# EAGLE board KRP_SMproject#2 (EAGLE 9.4.2)

Size 160 x 100 mm. Coordinates in mm from the lower left corner, seen from the top.
Outline: 0,0 160,0 160,100 0,100 0,0
Copper layers (1*16): Top 0.035mm / dielectric 1.5mm / Bottom 0.035mm
Design rules "default": minimum track width 6mil, minimum drill 0.35mm, track to track 6mil, track to pad 6mil, pad to pad 6mil, via to via 6mil, smd to smd 6mil, copper to edge 40mil, drill to drill 6mil, minimum pad ring 10mil, minimum via ring 8mil, stop-mask expansion 4mil, vias tented up to drill 0mil, thermal gap 10mil

## Footprints (pad centres in the part's own frame; a part is rotated, then mirrored left to right if it is on the bottom)
CAPC1608X90N = smd 0.75 x 0.94: 1 -0.7,0; 2 0.7,0
SODFL1608X70N = smd 0.55 x 0.42: 1 -0.8,0; 2 0.8,0
QFP50P1200X1200X160-64N = smd 1.45 x 0.3: 1 -5.75,3.75; 2 -5.75,3.25; 3 -5.75,2.75; 4 -5.75,2.25; 5 -5.75,1.75; 6 -5.75,1.25; 7 -5.75,0.75; 8 -5.75,0.25; 9 -5.75,-0.25; 10 -5.75,-0.75; 11 -5.75,-1.25; 12 -5.75,-1.75; 13 -5.75,-2.25; 14 -5.75,-2.75; 15 -5.75,-3.25; 16 -5.75,-3.75; 33 5.75,-3.75; 34 5.75,-3.25; 35 5.75,-2.75; 36 5.75,-2.25; 37 5.75,-1.75; 38 5.75,-1.25; 39 5.75,-0.75; 40 5.75,-0.25; 41 5.75,0.25; 42 5.75,0.75; 43 5.75,1.25; 44 5.75,1.75; 45 5.75,2.25; 46 5.75,2.75; 47 5.75,3.25; 48 5.75,3.75 | smd 0.3 x 1.45: 17 -3.75,-5.75; 18 -3.25,-5.75; 19 -2.75,-5.75; 20 -2.25,-5.75; 21 -1.75,-5.75; 22 -1.25,-5.75; 23 -0.75,-5.75; 24 -0.25,-5.75; 25 0.25,-5.75; 26 0.75,-5.75; 27 1.25,-5.75; 28 1.75,-5.75; 29 2.25,-5.75; 30 2.75,-5.75; 31 3.25,-5.75; 32 3.75,-5.75; 49 3.75,5.75; 50 3.25,5.75; 51 2.75,5.75; 52 2.25,5.75; 53 1.75,5.75; 54 1.25,5.75; 55 0.75,5.75; 56 0.25,5.75; 57 -0.25,5.75; 58 -0.75,5.75; 59 -1.25,5.75; 60 -1.75,5.75; 61 -2.25,5.75; 62 -2.75,5.75; 63 -3.25,5.75; 64 -3.75,5.75
SOIC127P600X175-8N = smd 1.525 x 0.7: 1 -2.712,1.905; 2 -2.712,0.635; 3 -2.712,-0.635; 4 -2.712,-1.905; 5 2.712,-1.905; 6 2.712,-0.635; 7 2.712,0.635; 8 2.712,1.905
TO-252-3-L1 = smd 2 x 2.5: 1 -2.3,-8.05; 2 2.3,-8.05 | smd 6 x 6: 3 0,-1.8
SOP65P640X120-29N = smd 1.6 x 0.45: 1 -2.875,4.225; 2 -2.875,3.575; 3 -2.875,2.925; 4 -2.875,2.275; 5 -2.875,1.625; 6 -2.875,0.975; 7 -2.875,0.325; 8 -2.875,-0.325; 9 -2.875,-0.975; 10 -2.875,-1.625; 11 -2.875,-2.275; 12 -2.875,-2.925; 13 -2.875,-3.575; 14 -2.875,-4.225; 15 2.875,-4.225; 16 2.875,-3.575; 17 2.875,-2.925; 18 2.875,-2.275; 19 2.875,-1.625; 20 2.875,-0.975; 21 2.875,-0.325; 22 2.875,0.325; 23 2.875,0.975; 24 2.875,1.625; 25 2.875,2.275; 26 2.875,2.925; 27 2.875,3.575; 28 2.875,4.225 | smd 2.8 x 5.5: 29 0,0
SHDR10W64P254_2X5_2032X910X935 = drill 1.1 pad 1.65 square: 1 0,0 | drill 1.1 pad 1.65: 2 0,2.54; 3 2.54,0; 4 2.54,2.54; 5 5.08,0; 6 5.08,2.54; 7 7.62,0; 8 7.62,2.54; 9 10.16,0; 10 10.16,2.54
22-23-2041 = drill 1 long: 1 -3.81,0; 2 -1.27,0; 3 1.27,0; 4 3.81,0
RESC1608X50N = smd 0.95 x 1: 1 -0.8,0; 2 0.8,0
SOT95P280X130-5N = smd 0.9 x 0.6: 1 -1.4,0.95; 2 -1.4,0; 3 -1.4,-0.95; 4 1.4,-0.95; 5 1.4,0.95
22-23-2021 = drill 1 long: 1 -1.27,0; 2 1.27,0
FA128 = smd 0.95 x 0.85: 1 -0.725,-0.575; 2 0.725,-0.575; 3 0.725,0.575; 4 -0.725,0.575

## Placement (x,y rotation side)
C1  0.1μｆ  [CAPC1608X90N]  -15.24,68.58 0 top  (outside the outline)
C2  0.01μｆ  [CAPC1608X90N]  -41.91,63.5 0 top  (outside the outline)
C3  0.33μｆ  [CAPC1608X90N]  -48.26,63.5 0 top  (outside the outline)
C4  GRM188F11H104ZA01C  [CAPC1608X90N]  -43.18,38.1 0 top  (outside the outline)
C5  2.2μｆ  [CAPC1608X90N]  -20.32,68.58 0 top  (outside the outline)
C6  0.1μｆ  [CAPC1608X90N]  -25.4,68.58 0 top  (outside the outline)
C7  1μｆ  [CAPC1608X90N]  -45.72,68.58 0 top  (outside the outline)
C8  GRM188F11H104ZA01C  [CAPC1608X90N]  -24.13,43.18 0 top  (outside the outline)
C9  1μｆ  [CAPC1608X90N]  -49.53,68.58 0 top  (outside the outline)
C10  15pF  [CAPC1608X90N]  -41.91,66.04 0 top  (outside the outline)
C11  15pF  [CAPC1608X90N]  -46.99,66.04 0 top  (outside the outline)
C12  100nF  [CAPC1608X90N]  -22.86,63.5 0 top  (outside the outline)
C13  1μｆ  [CAPC1608X90N]  -40.64,68.58 0 top  (outside the outline)
C14  100nF  [CAPC1608X90N]  -29.21,63.5 0 top  (outside the outline)
C15  100nF  [CAPC1608X90N]  -35.56,63.5 0 top  (outside the outline)
C16  4700ｐＦ  [CAPC1608X90N]  -46.99,60.96 0 top  (outside the outline)
C17  GRM188F11H104ZA01C  [CAPC1608X90N]  -45.72,43.18 0 top  (outside the outline)
C18  0.1μF  [CAPC1608X90N]  -60.96,63.5 0 top  (outside the outline)
C19  0.1μF  [CAPC1608X90N]  -16.51,66.04 0 top  (outside the outline)
C20  0.1μF  [CAPC1608X90N]  -22.86,66.04 0 top  (outside the outline)
C21  0.1μF  [CAPC1608X90N]  -29.21,66.04 0 top  (outside the outline)
C22  GRM188F11H104ZA01C  [CAPC1608X90N]  -24.13,45.72 0 top  (outside the outline)
C23  GRM188F11H104ZA01C  [CAPC1608X90N]  -45.72,45.72 0 top  (outside the outline)
C24  10nF  [CAPC1608X90N]  -52.07,66.04 0 top  (outside the outline)
C25  220μF  [CAPC1608X90N]  -54.61,60.96 0 top  (outside the outline)
C26  GRM188F11H104ZA01C  [CAPC1608X90N]  -24.13,48.26 0 top  (outside the outline)
C27  220μF  [CAPC1608X90N]  -60.96,60.96 0 top  (outside the outline)
C28  10nF  [CAPC1608X90N]  -57.15,66.04 0 top  (outside the outline)
C29  GRM188F11H104ZA01C  [CAPC1608X90N]  -45.72,48.26 0 top  (outside the outline)
C30  GRM188F11H104ZA01C  [CAPC1608X90N]  -24.13,50.8 0 top  (outside the outline)
C31  220μF  [CAPC1608X90N]  -16.51,63.5 0 top  (outside the outline)
C32  10nF  [CAPC1608X90N]  -62.23,66.04 0 top  (outside the outline)
D1  RB751S-40TE61  [SODFL1608X70N]  -38.1,55.88 0 top  (outside the outline)
D2  RB751S-40TE61  [SODFL1608X70N]  -53.34,55.88 0 top  (outside the outline)
D3  RB751S-40TE61  [SODFL1608X70N]  -20.32,58.42 0 top  (outside the outline)
D4  RB751S-40TE61  [SODFL1608X70N]  -35.56,58.42 0 top  (outside the outline)
D5  RB751S-40TE61  [SODFL1608X70N]  -50.8,58.42 0 top  (outside the outline)
D6  RB751S-40TE61  [SODFL1608X70N]  -20.32,60.96 0 top  (outside the outline)
D7  RB751S-40TE61  [SODFL1608X70N]  -35.56,60.96 0 top  (outside the outline)
IC1  STM32F405RGT6  [QFP50P1200X1200X160-64N]  -21.59,7.62 0 top  (outside the outline)
IC2  MCP2561-E_SN  [SOIC127P600X175-8N]  -50.8,29.21 0 top  (outside the outline)
IC3  NJM2845DL1-05-TE1  [TO-252-3-L1]  -39.37,10.16 0 top  (outside the outline)
IC4  L6470H  [SOP65P640X120-29N]  -46.99,20.32 0 top  (outside the outline)
IC5  L6470H  [SOP65P640X120-29N]  -55.88,20.32 0 top  (outside the outline)
IC6  L6470H  [SOP65P640X120-29N]  -17.78,31.75 0 top  (outside the outline)
J1  BH-10SG  [SHDR10W64P254_2X5_2032X910X935]  -38.1,29.21 0 top  (outside the outline)
OUT1A  IC5 L6470  [22-23-2041]  -54.61,6.35 0 top  (outside the outline)
R1  １００ｋ  [RESC1608X50N]  -54.61,63.5 0 top  (outside the outline)
R2  300Ω  [RESC1608X50N]  -35.56,66.04 0 top  (outside the outline)
R3  60Ω  [RESC1608X50N]  -30.48,68.58 0 top  (outside the outline)
R4  60Ω  [RESC1608X50N]  -35.56,68.58 0 top  (outside the outline)
R5  RG1608N-101-W-T1  [RESC1608X50N]  -44.45,50.8 0 top  (outside the outline)
R6  [RESC1608X50N]  -53.34,68.58 0 top  (outside the outline)
R7  RG1608N-101-W-T1  [RESC1608X50N]  -21.59,53.34 0 top  (outside the outline)
R8  RG1608N-101-W-T1  [RESC1608X50N]  -39.37,53.34 0 top  (outside the outline)
R9  RG1608N-101-W-T1  [RESC1608X50N]  -57.15,53.34 0 top  (outside the outline)
R10  RG1608N-101-W-T1  [RESC1608X50N]  -21.59,55.88 0 top  (outside the outline)
U1  NJM2863F33  [SOT95P280X130-5N]  -19.05,39.37 0 top  (outside the outline)
X1  +36V  [22-23-2021]  -39.37,20.32 0 top  (outside the outline)
X3  IC6 L6470  [22-23-2041]  -19.05,20.32 0 top  (outside the outline)
X4  IC7 L6470  [22-23-2041]  -30.48,20.32 0 top  (outside the outline)
Y1  26mhz  [FA128]  -27.94,38.1 0 top  (outside the outline)

## Library data of the parts
C1-C32 = GRM188F11H104ZA01C; DESCRIPTION: Multilayer Ceramic Capacitors MLCC - SMD/SMT; HEIGHT: 0.9mm; MANUFACTURER_NAME: Murata Electronics; MANUFACTURER_PART_NUMBER: GRM188F11H104ZA01C
D1-D7 = RB751S-40TE61; ALLIED_NUMBER: 70666541; DESCRIPTION: Schottky Diodes & Rectifiers SCHOTTKY 40V 30MA; HEIGHT: 0.7mm; MANUFACTURER_NAME: ROHM Semiconductor; MANUFACTURER_PART_NUMBER: RB751S-40TE61; RS_PART_NUMBER: 6942884; RS_PRICE-STOCK: http://uk.rs-online.com/web/p/products/6942884
IC1 = STM32F405RGT6; ALLIED_NUMBER: 70391099; DESCRIPTION: MCU 32-Bit, ARM Cortex M4, 1MB Flash STMicroelectronics STM32F405RGT6, 32bit ARM Cortex M4F Microcontroller, 168MHz, 1024 kB Flash, 64-Pin LQFP; HEIGHT: 1.6mm; MANUFACTURER_NAME: STMicroelectronics; MANUFACTURER_PART_NUMBER: STM32F405RGT6; RS_PART_NUMBER: 7468217P; RS_PRICE-STOCK: http://uk.rs-online.com/web/p/products/7468217P
IC2 = MCP2561-E_SN; ALLIED_NUMBER: 70415103; DESCRIPTION: CAN Transceiver 1Mbps 5V 125degC SOIC8 Microchip MCP2561-E/SN, CAN Transceiver 1MBps 1-channel IEC 61000-4-2, 8-Pin SOIC; HEIGHT: 1.75mm; MANUFACTURER_NAME: Microchip; MANUFACTURER_PART_NUMBER: MCP2561-E/SN; RS_PART_NUMBER: 7990216P; RS_PRICE-STOCK: http://uk.rs-online.com/web/p/products/7990216P
IC3 = NJM2845DL1-05-TE1; DESCRIPTION: LDO Voltage Regulators LDO w/On/Off Cntrl; HEIGHT: mm; MANUFACTURER_NAME: NJR; MANUFACTURER_PART_NUMBER: NJM2845DL1-05-TE1
IC4-IC6 = L6470H; ALLIED_NUMBER: 70520836; DESCRIPTION: Motor / Motion / Ignition Controllers & Drivers 8 - 45V 7.0A 1/128 Microstepping SPI; HEIGHT: 1.2mm; MANUFACTURER_NAME: STMicroelectronics; MANUFACTURER_PART_NUMBER: L6470H; RS_PART_NUMBER: 8289898P; RS_PRICE-STOCK: http://uk.rs-online.com/web/p/products/8289898P
J1 = BH-10SG; DESCRIPTION: ic; HEIGHT: 9.35mm; MANUFACTURER_NAME: Useconn Electronics; MANUFACTURER_PART_NUMBER: BH-10SG
OUT1A X3 X4 = con-molex; MF: MOLEX; MPN: 22-23-2041; OC_FARNELL: 1462920; OC_NEWARK: 38C0355
R1-R10 = RG1608N-101-W-T1; DESCRIPTION: Thin Film Resistors - SMD 1/10W 100 Ohms 0.05% 0603 10ppm; HEIGHT: 0.5mm; MANUFACTURER_NAME: Susumu; MANUFACTURER_PART_NUMBER: RG1608N-101-W-T1; RS_PART_NUMBER: 0160452; RS_PRICE-STOCK: http://uk.rs-online.com/web/p/products/0160452
U1 = NJM2863F33; DESCRIPTION: Ultra Low Noise Low Dropout Voltage Regulator, SOT-23-5; HEIGHT: 1.3mm; MANUFACTURER_NAME: NJR; MANUFACTURER_PART_NUMBER: NJM2863F33
X1 = con-molex; MF: MOLEX; MPN: 22-23-2021; OC_FARNELL: 1462926; OC_NEWARK: 25C3832
Y1 = FA-128_32.0000MF20X-K3; DESCRIPTION: MHz range crystal unit, FA-128; HEIGHT: mm; MANUFACTURER_NAME: Epson Timing; MANUFACTURER_PART_NUMBER: FA-128 32.0000MF20X-K3

## Nets
+3V3: C19.2 C20.2 C21.2 IC4.6 IC4.17 IC5.6 IC5.17 IC6.6 IC6.17
+5V: C4.2 C5.2 C6.1 C7.2 C8.2 C9.2 C12.2 C13.2 C14.2 C15.2 IC1.1 IC1.13 IC1.19 IC1.32 IC1.48 IC1.64 IC2.3 IC3.2 U1.4
BUSY/SYNC: IC1.24 IC1.37 IC1.54 IC4.22 IC5.22 IC6.22
CANH: IC2.7 J1.5 R3.2
CANL: IC2.6 J1.6 R4.1
CK: IC1.21 IC1.34 IC1.51 IC4.19 IC5.19 IC6.19
CS: IC1.20 IC1.33 IC1.50 IC4.23 IC5.23 IC6.23
FLAG: IC1.25 IC1.38 IC1.55 IC4.24 IC5.24 IC6.24
GND: C1.1 C2.1 C3.1 C4.1 C5.1 C6.2 C7.1 C8.1 C9.1 C10.1 C11.1 C12.1 C13.1 C14.1 C15.1 C16.1 C17.1 C18.1 C19.1 C20.1 C21.1 C22.1 C23.1 C26.1 C29.1 C30.1 IC1.12 IC1.18 IC1.63 IC2.2 IC3.3 IC4.9 IC4.13 IC4.21 IC4.27 IC5.9 IC5.13 IC5.21 IC5.27 IC6.9 IC6.13 IC6.21 IC6.27 J1.7 J1.8 R6.1 R8.1 R10.1 U1.2 X1.1 Y1.2 Y1.4
N$1: C1.2 J1.2 R1.1 U1.5
N$2: R1.2 U1.1
N$3: C3.2 IC3.1 J1.1
N$4: C2.2 U1.3
N$5: IC2.5 R2.2
N$6: C16.2 R2.1
N$7: C11.2 IC1.5 Y1.1
N$8: C10.2 IC1.6 Y1.3
N$9: C28.1 D3.1 D4.1 D5.2
N$10: IC6.5 R7.1 R8.2
N$11: IC4.5 R9.1 R10.2
N$12: C28.2 IC6.10
N$13: R3.1 R4.2
N$14: C27.2 D5.1 IC6.11
N$17: C32.1 D6.1 D7.2
N$18: C32.2 IC4.10
N$19: C31.2 D7.1 IC4.11
N$28: C24.1 D1.1 D2.2
N$30: C24.2 IC5.10
N$31: C25.2 D2.1 IC5.11
N$34: IC5.5 R5.1 R6.2
OUT1A: IC4.1 IC5.1 IC6.1 OUT1A.1 X3.1 X4.1
OUT1B: IC4.14 IC5.14 IC6.14 OUT1A.2 X3.2 X4.2
OUT2A: IC4.28 IC5.28 IC6.28 OUT1A.3 X3.3 X4.3
OUT2B: IC4.15 IC5.15 IC6.15 OUT1A.4 X3.4 X4.4
RXD: IC1.44 IC2.4
SDI: IC1.23 IC1.36 IC1.53 IC4.20 IC5.20 IC6.20
SDO: IC1.22 IC1.35 IC1.52 IC4.18 IC5.18 IC6.18
STBY: IC1.43 IC2.8
STBY/RST: IC1.27 IC1.40 IC1.57 IC4.3 IC5.3 IC6.3
STCK: IC1.26 IC1.39 IC1.56 IC4.25 IC5.25 IC6.25
TXD: IC1.45 IC2.1
VDD: C17.2 C18.2 C22.2 C23.2 C25.1 C26.2 C27.1 C29.2 C30.2 C31.1 D1.2 D3.2 D4.2 D6.2 IC4.2 IC4.12 IC4.16 IC4.26 IC5.2 IC5.12 IC5.16 IC5.26 IC6.2 IC6.12 IC6.16 IC6.26 R5.2 R7.2 R9.2 X1.2

## Tracks (layer width: path | path; a pad name or v marks a point on that pad's centre or on a via)
+3V3  (8 unrouted)
+5V  (18 unrouted)
BUSY/SYNC  (5 unrouted)
CANH  (2 unrouted)
CANL  (2 unrouted)
CK  (5 unrouted)
CS  (5 unrouted)
FLAG  (5 unrouted)
GND  (51 unrouted)
N$1  (3 unrouted)
N$2  (1 unrouted)
N$3  (2 unrouted)
N$4  (1 unrouted)
N$5  (1 unrouted)
N$6  (1 unrouted)
N$7  (2 unrouted)
N$8  (2 unrouted)
N$9  (3 unrouted)
N$10  (2 unrouted)
N$11  (2 unrouted)
N$12  (1 unrouted)
N$13  (1 unrouted)
N$14  (2 unrouted)
N$17  (2 unrouted)
N$18  (1 unrouted)
N$19  (2 unrouted)
N$28  (2 unrouted)
N$30  (1 unrouted)
N$31  (2 unrouted)
N$34  (2 unrouted)
OUT1A  (5 unrouted)
OUT1B  (5 unrouted)
OUT2A  (5 unrouted)
OUT2B  (5 unrouted)
RXD  (1 unrouted)
SDI  (5 unrouted)
SDO  (5 unrouted)
STBY  (1 unrouted)
STBY/RST  (5 unrouted)
STCK  (5 unrouted)
TXD  (1 unrouted)
VDD  (29 unrouted)